# Altium PCB 175-00060, rev2, PCB, NRES RTD_TEC Board.PcbDoc (part 4 of 4)
Units mm, origin at the board's own origin, x right, y up, seen from the top; angles counter-clockwise.
Board outline 188.3 x 85 mm, 8 copper layers (Top Layer (*.GTL), MidLayer1 (*.G1), InternalPlane1 (*.GP1), InternalPlane2 (*.GP2), InternalPlane3 (*.GP3), InternalPlane4 (*.GP4), MidLayer2 (*.G2), Bottom Layer (*.GBL)), stack 1.748 mm thick; 256 components, 199 nets, 1067 pads, 575 vias.
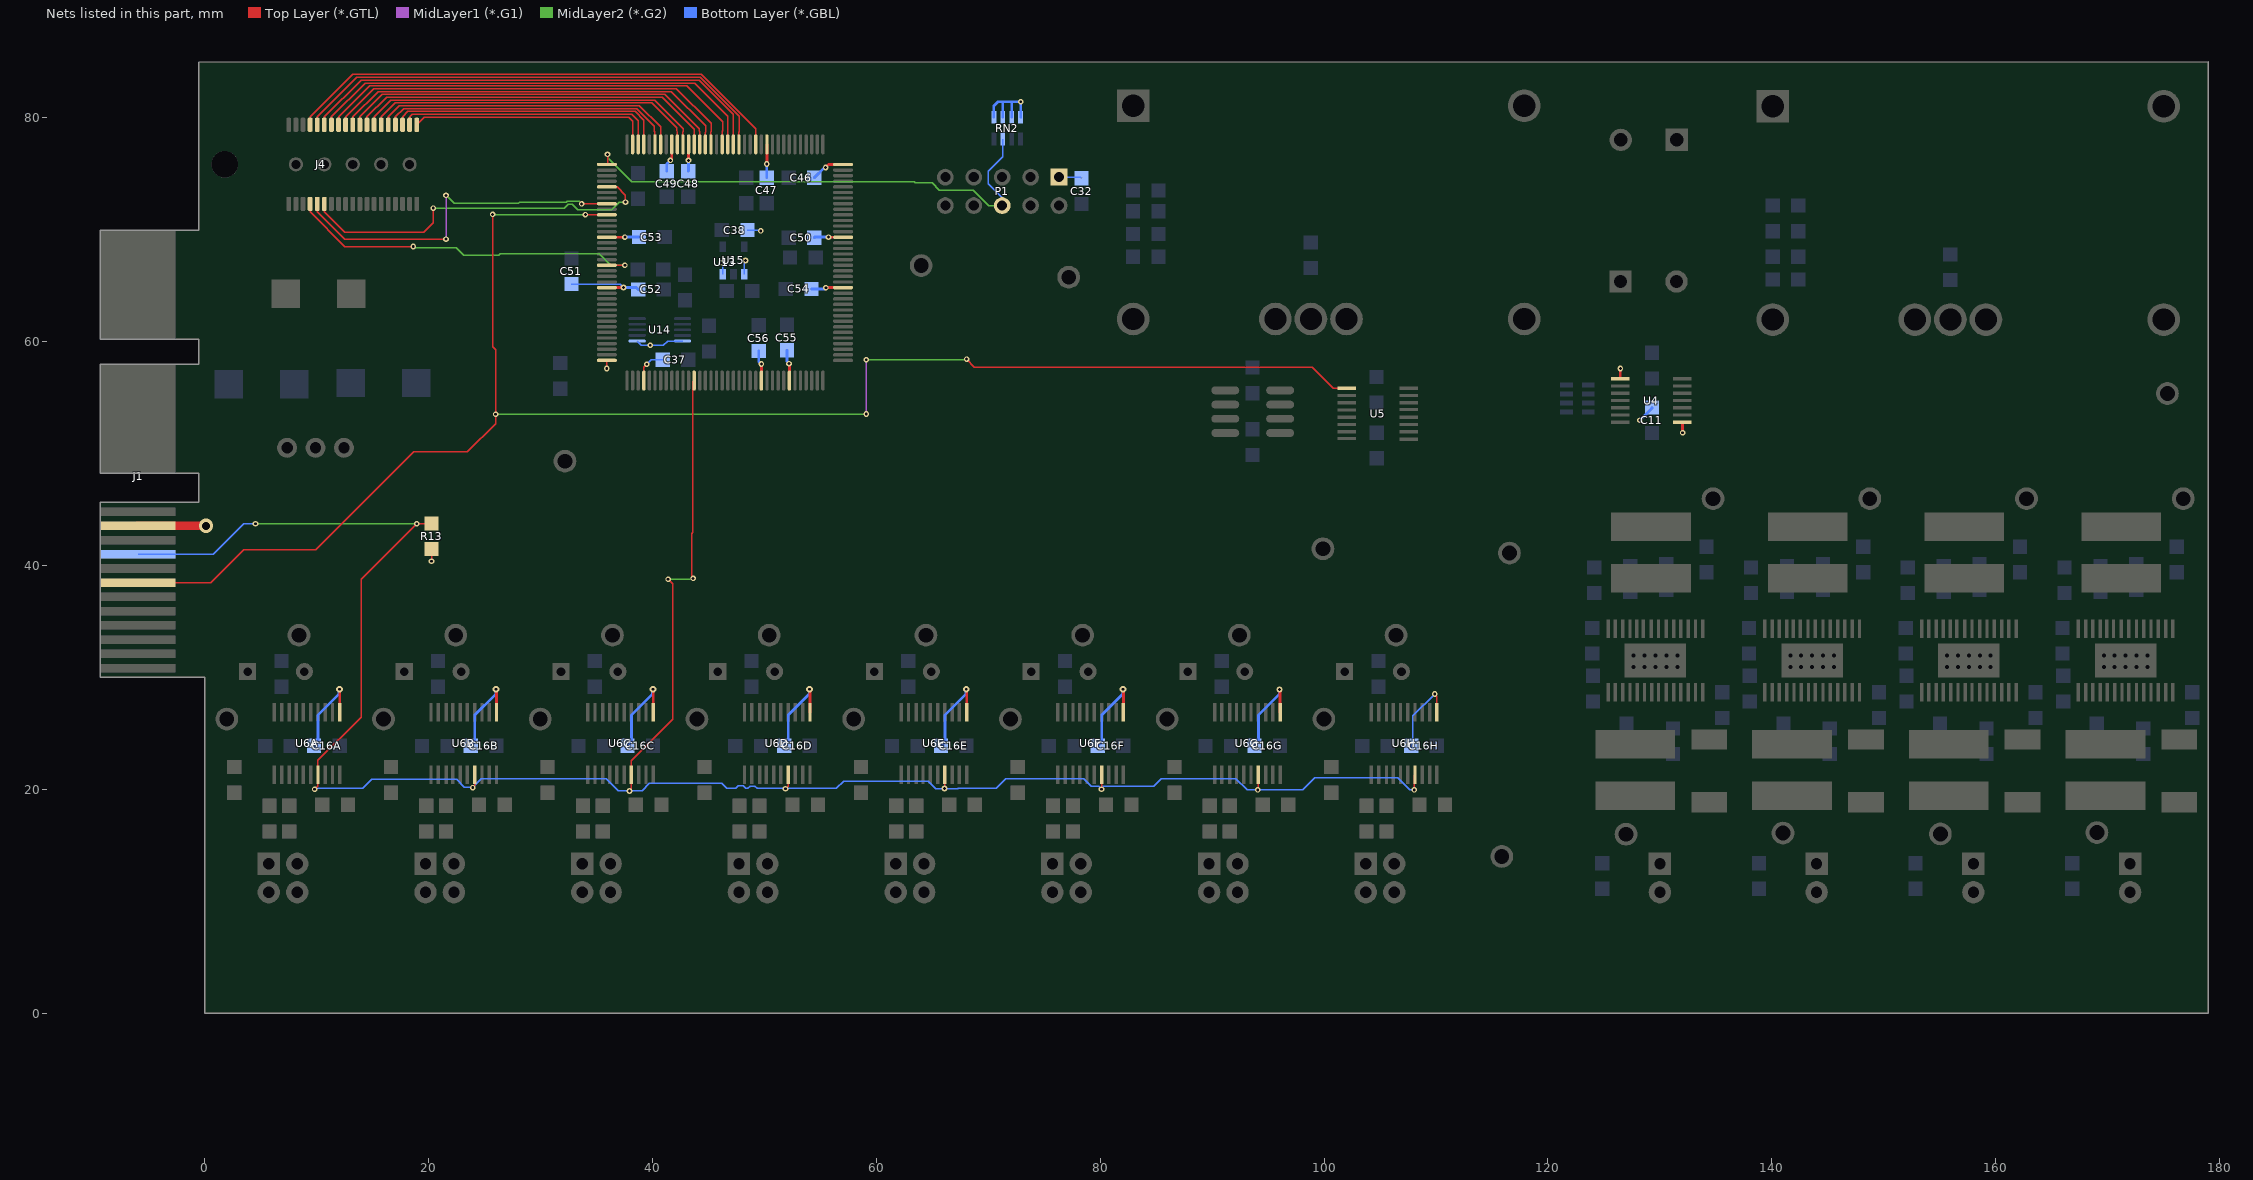
[diagram p10: the nets of this part, all layers, seen from the top]

## Via types
v1: diameter 0.508, hole 0.254, Top Layer (*.GTL) to Bottom Layer (*.GBL), tented both sides, 324 vias
v2: diameter 0.61, hole 0.254, Top Layer (*.GTL) to Bottom Layer (*.GBL), tented both sides, 234 vias
v3: diameter 1.27, hole 0.711, Top Layer (*.GTL) to Bottom Layer (*.GBL), 17 vias

## Nets (pads, with @x,y where several pads share a name; then routed paths per layer and width w, separated by ;. In a path a pad name is that pad's centre, name@x,y a point inside that pad or via, vN(x,y) a via of type N, cw(c..) or ccw(c..) an arc to the next point about the centre after c; other vN are vias at no path point) (continued)
TEST7: J4.7 U13.19 | length 32.5
  Top Layer (*.GTL) w0.127: J4.7@9.423,72.288 9.423,71.572 12.517,68.478 v1@18.618,68.478 ; U13.19@35.932,66.806 37.537,66.806 v1(37.541,66.802)
  MidLayer2 (*.G2) w0.127: v1(18.644,68.478) 18.745,68.377 22.479,68.377 23.139,67.716 26.264,67.716 26.391,67.843 35.255,67.843 36.297,66.802 v1(37.541,66.802)
TEST8: J4.8 U13.121 | length 45.5
  Top Layer (*.GTL) w0.127: J4.8@9.423,79.35 9.423,80.055 13.214,83.845 44.381,83.845 49.232,78.994 U13.121@49.232,77.606
TEST9: J4.9 U13.8 | length 32
  Top Layer (*.GTL) w0.127: J4.9@10.058,72.288 10.058,71.572 12.517,69.113 18.618,69.113 18.644,69.139 v1(21.565,69.139) ; v1(33.68,72.288) 33.698,72.306 U13.8@35.932,72.306
  MidLayer1 (*.G1) w0.127: v1(21.565,69.139) v1(21.565,73.05)
  MidLayer2 (*.G2) w0.127: v1(21.565,73.05) 22.288,72.326 28.023,72.326 28.137,72.441 32.312,72.441 32.375,72.504 33.465,72.504 v1(33.68,72.288)
TEST10: J4.10 U13.124 | length 43.8
  Top Layer (*.GTL) w0.127: J4.10@10.058,79.35 10.058,80.055 13.595,83.591 44.276,83.591 47.752,80.115 47.752,78.715 47.732,78.695 U13.124@47.732,77.606
TEST11: J4.11 U13.5 | length 33.2
  Top Layer (*.GTL) w0.127: J4.11@10.693,72.288 10.693,71.572 12.517,69.748 19.583,69.748 20.422,70.587 v1(20.422,71.907) ; U13.5@35.932,73.806 36.862,73.806 37.592,73.076 v1(37.592,72.441)
  MidLayer2 (*.G2) w0.127: v1(20.422,71.907) 32.137,71.907 32.48,72.25 32.849,72.25 33.318,71.78 36.373,71.78 37.033,72.441 v1(37.592,72.441)
TEST12: J4.12 U13.125 | length 42.5
  Top Layer (*.GTL) w0.127: J4.12@10.693,79.35 10.693,80.055 13.976,83.337 44.171,83.337 47.232,80.276 U13.125@47.232,77.606
TEST14: J4.14 U13.126 | length 41.1
  Top Layer (*.GTL) w0.127: J4.14@11.328,79.35 11.328,80.055 14.357,83.083 43.764,83.083 46.736,80.112 46.736,78.791 46.732,78.787 U13.126@46.732,77.606
TEST16: J4.16 U13.127 | length 39.5
  Top Layer (*.GTL) w0.127: J4.16@11.963,79.35 11.963,80.055 14.738,82.829 43.078,82.829 46.279,79.629 46.279,78.816 46.232,78.769 U13.127@46.232,77.606
TEST18: J4.18 U13.129 | length 37.5
  Top Layer (*.GTL) w0.127: J4.18@12.598,79.35 12.598,80.055 15.119,82.575 42.139,82.575 45.237,79.477 45.237,78.74 45.232,78.735 U13.129@45.232,77.606
TEST20: J4.20 U13.130 | length 36.1
  Top Layer (*.GTL) w0.127: J4.20@13.233,79.35 13.233,80.055 15.5,82.321 41.681,82.321 44.755,79.248 44.755,78.697 44.732,78.674 U13.130@44.732,77.606
TEST22: J4.22 U13.131 | length 34.5
  Top Layer (*.GTL) w0.127: J4.22@13.868,79.35 13.868,80.055 15.881,82.067 41.123,82.067 44.196,78.994 44.196,78.791 44.232,78.755 U13.131@44.232,77.606
TEST24: J4.24 U13.132 | length 33.2
  Top Layer (*.GTL) w0.127: J4.24@14.503,79.35 14.503,80.055 16.262,81.813 40.869,81.813 43.739,78.943 43.739,78.854 43.732,78.848 U13.132@43.732,77.606
TEST26: J4.26 U13.134 | length 31.4
  Top Layer (*.GTL) w0.127: J4.26@15.138,79.35 15.138,80.055 16.643,81.559 40.208,81.559 42.748,79.019 42.748,78.74 42.732,78.724 U13.134@42.732,77.606
TEST28: J4.28 U13.135 | length 30
  Top Layer (*.GTL) w0.127: J4.28@15.773,79.35 15.773,80.055 17.024,81.305 39.954,81.305 42.164,79.096 42.164,78.816 42.232,78.748 U13.135@42.232,77.606
TEST30: J4.30 U13.138 | length 27.8
  Top Layer (*.GTL) w0.127: J4.30@16.408,79.35 16.408,80.055 17.405,81.051 38.837,81.051 40.732,79.156 U13.138@40.732,77.606
TEST32: J4.32 U13.139 | length 26.4
  Top Layer (*.GTL) w0.127: J4.32@17.043,79.35 17.043,80.055 17.786,80.797 38.608,80.797 40.183,79.223 40.183,78.765 40.232,78.716 U13.139@40.232,77.606
TEST34: J4.34 U13.141 | length 24.9
  Top Layer (*.GTL) w0.127: J4.34@17.678,79.35 17.678,80.055 18.167,80.543 38.456,80.543 39.232,79.767 U13.141@39.232,77.606
TEST36: J4.36 U13.142 | length 23.6
  Top Layer (*.GTL) w0.127: J4.36@18.313,79.35 18.313,80.055 18.548,80.289 38.176,80.289 38.732,79.734 U13.142@38.732,77.606
TEST38: J4.38 U13.143 | length 21.8
  Top Layer (*.GTL) w0.127: J4.38@18.948,79.35 19.634,80.035 37.871,80.035 38.232,79.675 U13.143@38.232,77.606
TMS: P1.6 RN2.5 U13.1 | length 45.2
  Top Layer (*.GTL) w0.127: U13.1@35.932,75.806 35.992,75.866 v1(35.992,76.708)
  MidLayer2 (*.G2) w0.127: v1(35.992,76.708) 35.992,76.403 38.151,74.244 63.398,74.244 63.475,74.168 64.999,74.168 65.646,73.52 68.653,73.52 70.037,72.136 P1.6@71.247,72.136
  Bottom Layer (*.GBL) w0.127: P1.6@71.247,72.136 71.247,72.847 70.002,74.092 70.002,75.209 71.298,76.505 RN2.5@71.298,78.078
VCC: C11.1 C16A.2 C16B.2 C16C.2 C16D.2 C16E.2 C16F.2 C16G.2 C16H.2 C32.2 C37.2 C38.2 C46.2 C47.2 C48.2 C49.2 C50.2 C51.2 C52.2 C53.2 C54.2 C55.2 C56.2 J1.S23 P1.1 R13.2 RN2.2 RN2.4 RN2.6 RN2.8 U4.1 U4.8 U6A.1 U6B.1 U6C.1 U6D.1 U6E.1 U6F.1 U6G.1 U6H.1 U13.14 U13.23 U13.36 U13.40 U13.61 U13.66 U13.86 U13.95 U13.108 U13.119 U13.133 U13.136 U14.5 U14.6 U15.1 U15.3 | length 128.7
  Top Layer (*.GTL) w0.127: v1(20.269,40.361) R13.2@20.269,41.453 ; v1(35.916,57.582) 35.932,57.598 U13.36@35.932,58.306 ; U13.40@39.232,56.506 39.232,57.698 v1(39.497,57.963) ; v1(109.88,28.499) 110.074,28.305 U6H.1@110.074,26.861
  Top Layer (*.GTL) w0.254: v2(12.04,28.931) 12.074,28.896 U6A.1@12.074,26.861 ; v2(26.04,28.931) 26.074,28.896 U6B.1@26.074,26.861 ; U13.23@35.932,64.806 37.399,64.806 v1(37.414,64.821) ; U13.14@35.932,69.306 37.531,69.306 v1(37.541,69.317) ; v2(40.04,28.931) 40.074,28.896 U6C.1@40.074,26.861 ; v1(41.605,76.175) 41.732,76.301 U13.136@41.732,77.606 ; v1(43.231,76.175) 43.232,76.176 U13.133@43.232,77.606 ; U13.61@49.732,56.506 v1(49.732,57.989) ; v1(50.216,75.844) 50.232,75.861 U13.119@50.232,77.606 ; v1(52.197,58.014) 52.232,57.979 U13.66@52.232,56.506 ; v2(54.04,28.931) 54.074,28.896 U6D.1@54.074,26.861 ; v1(55.474,75.54) 55.74,75.806 U13.108@57.032,75.806 ; v1(55.499,64.795) 55.51,64.806 U13.86@57.032,64.806 ; v1(55.728,69.317) 55.738,69.306 U13.95@57.032,69.306 ; v2(68.04,28.931) 68.074,28.896 U6E.1@68.074,26.861 ; v2(82.04,28.931) 82.074,28.896 U6F.1@82.074,26.861 ; U6G.1@96.074,26.861 v1@96.074,28.896 ; U4.1@126.454,56.672 126.454,57.569 v1(126.467,57.582) ; U4.8@132.004,52.772 132.004,51.867 v1(132.029,51.841)
  Top Layer (*.GTL) w0.762: J1.S23@-5.95,43.525 v3(0.117,43.525)
  Bottom Layer (*.GBL) w0.127: C51.2@32.766,65.126 37.109,65.126 v1(37.414,64.821) ; U14.6@38.64,60.036 39.012,59.665 v1(39.802,59.665) 39.827,59.639 40.97,59.639 41.364,60.033 42.687,60.033 U14.5@42.69,60.036 ; v1(39.497,57.963) 39.903,58.369 C37.2@40.919,58.369 ; v1(46.126,67.031) 46.294,66.863 U15.3@46.294,66.009 ; U15.1@48.194,66.009 48.194,67.117 v1(48.311,67.234) ; C38.2@48.489,69.952 49.606,69.952 v1(49.682,69.875) ; P1.1@76.327,74.676 78.232,74.676 C32.2@78.334,74.574 ; C16H.2@107.779,23.876 107.937,24.034 107.937,26.556 v1(109.88,28.499)
  Bottom Layer (*.GBL) w0.254: C16A.2@9.754,23.851 C16A.2@9.779,23.876 10.135,24.232 10.135,26.619 12.014,28.499 12.014,28.905 v2(12.04,28.931) ; C16B.2@23.754,23.851 C16B.2@23.779,23.876 24.135,24.232 24.135,26.619 26.014,28.499 26.014,28.905 v2(26.04,28.931) ; v1(37.414,64.821) 38.557,64.821 C52.2@38.735,64.643 ; v1(37.541,69.317) C53.2@38.811,69.317 ; C16C.2@37.754,23.851 C16C.2@37.779,23.876 38.135,24.232 38.135,26.619 40.014,28.499 40.014,28.905 v2(40.04,28.931) ; C49.2@41.275,75.209 41.275,75.844 v1(41.605,76.175) ; C48.2@43.205,75.209 43.231,75.235 v1(43.231,76.175) ; C56.2@49.505,59.157 49.505,58.217 v1(49.732,57.989) ; C47.2@50.216,74.625 v1(50.216,75.844) ; C16D.2@51.754,23.851 C16D.2@51.779,23.876 52.135,24.232 52.135,26.619 54.014,28.499 54.014,28.905 v2(54.04,28.931) ; C55.2@52.019,59.207 52.019,58.191 v1(52.197,58.014) ; C54.2@54.204,64.694 55.397,64.694 v1(55.499,64.795) ; C50.2@54.458,69.266 54.508,69.317 v1(55.728,69.317) ; C46.2@54.458,74.625 55.372,75.54 v1(55.474,75.54) ; C16E.2@65.754,23.851 C16E.2@65.779,23.876 66.135,24.232 66.135,26.619 68.014,28.499 68.014,28.905 v2(68.04,28.931) ; RN2.8@70.498,80.028 70.498,81.039 70.866,81.407 72.136,81.407 ; RN2.6@71.298,80.028 71.298,81.356 ; RN2.4@72.098,80.028 72.098,81.369 72.136,81.407 ; RN2.2@72.898,80.028 v1(72.898,81.407) 72.136,81.407 ; C16F.2@79.754,23.851 C16F.2@79.779,23.876 80.135,24.232 80.135,26.619 82.014,28.499 82.014,28.905 v2(82.04,28.931) ; C16G.2@93.779,23.876 94.135,24.232 94.135,26.619 96.014,28.499 v1(96.014,28.905) ; C16H.2@107.754,23.851 C16H.2@107.779,23.876 ; v1(128.219,52.959) 129.286,54.026 C11.1@129.286,54.102
~DRDY: J1.S9 R13.1 U6A.17 U6B.17 U6C.17 U6D.17 U6E.17 U6F.17 U6G.17 U6H.17 U13.49 | length 206.9
  Top Layer (*.GTL) w0.127: v1(9.83,19.99) 10.124,20.284 U6A.17@10.124,21.311 10.124,22.581 13.97,26.426 13.97,38.735 v1(18.948,43.713) 20.244,43.713 R13.1@20.269,43.739 ; v1(23.952,20.142) 24.124,20.314 U6B.17@24.124,21.311 ; v1(37.948,19.837) 38.124,20.014 U6C.17@38.124,21.311 38.124,22.555 41.808,26.239 41.808,38.354 v1(41.402,38.76) ; v1(43.637,38.837) 43.497,38.976 43.497,42.818 43.624,42.945 43.624,56.399 U13.49@43.732,56.506 ; v1(51.892,20.041) 52.124,20.273 U6D.17@52.124,21.311 ; v1(66.091,20.066) 66.124,20.099 U6E.17@66.124,21.311 ; v1(80.124,20.003) U6F.17@80.124,21.311 ; v1(94.082,19.939) 94.124,19.982 U6G.17@94.124,21.311 ; v1(108.052,19.939) U6H.17@108.052,21.238
  MidLayer2 (*.G2) w0.127: v1(4.547,43.713) v1(18.948,43.713) ; v1(41.402,38.76) 43.561,38.76 v1(43.637,38.837)
  Bottom Layer (*.GBL) w0.127: J1.S9@-5.95,40.985 0.777,40.985 3.505,43.713 v1(4.547,43.713) ; v1(9.83,19.99) 9.919,20.079 14.135,20.079 14.935,20.879 22.504,20.879 23.19,20.193 23.952,20.193 24.689,20.93 35.865,20.93 36.932,19.863 39.085,19.863 39.733,20.51 46.215,20.51 46.66,20.066 47.446,20.066 47.688,20.307 48.098,20.307 48.339,20.066 48.513,20.066 48.729,20.282 49.139,20.282 49.355,20.066 53.288,20.066 53.301,20.079 53.711,20.079 53.724,20.066 56.413,20.066 57.074,20.726 64.643,20.726 65.329,20.041 67.263,20.041 67.301,20.079 70.701,20.079 71.552,20.93 78.537,20.93 79.197,20.269 79.858,20.269 v1(80.124,20.003) ; 80.124,20.269 84.785,20.269 85.471,20.955 92.1,20.955 93.116,19.939 v1(94.082,19.939) 98.095,19.939 99.187,21.031 106.578,21.031 107.671,19.939 v1(108.052,19.939)
~LDAC: J1.S19 U5.1 U13.10 | length 148.9
  Top Layer (*.GTL) w0.127: J1.S19@-5.95,38.445 0.549,38.445 3.48,41.377 9.913,41.377 18.676,50.14 23.477,50.14 25.997,52.66 v1(25.997,53.492) 25.997,59.258 25.73,59.525 v1(25.73,71.349) ; v1(34.011,71.323) 33.985,71.323 34.002,71.306 U13.10@35.932,71.306 ; v1@68.059,58.407 68.758,57.709 98.927,57.709 100.813,55.823 U5.1@102.006,55.823
  MidLayer1 (*.G1) w0.127: v1(59.106,53.518) v1(59.106,58.369)
  MidLayer2 (*.G2) w0.127: v1(25.73,71.349) 25.756,71.323 v1(34.011,71.323) ; v1(25.997,53.492) 59.08,53.492 v1(59.106,53.518) ; v1(59.106,58.369) 68.021,58.369 v1(68.072,58.42)
pads on no net: J4.13 J4.15 J4.17 J4.19 J4.21 J4.23 J4.25 J4.27 J4.29 J4.31 J4.33 J4.35 J4.37 J4.A P1.3 P1.5 P1.7 P1.9 U2.3 U2.5 U3.3 U3.5 U4.6 U4.9 U5.6 U5.7 U5.10 U5.11 U6A.10 U6B.10 U6C.10 U6D.10 U6E.10 U6F.10 U6G.10 U6H.10 U7A.13 U7B.13 U7C.13 U7D.13 U8.1 U8.5 U8.7 U8.8 U13.33 U13.35 U13.39 U13.53 U13.55 U13.63 U13.73 U13.74 U13.80 U13.85 U13.87 U13.88 U13.90 U13.91 U13.92 U13.93 U13.96 U13.97 U13.98 U13.99 U13.101 U13.102 U13.103 U13.104 U13.105 U13.110 U13.111 U13.112 U13.113 U13.114 U13.115 U13.123 U13.140 U15.4
copper on no net: | length 7.5
  Top Layer (*.GTL) w0.254: v2(9.119,18.923) 9.347,19.152
  Bottom Layer (*.GBL) w0.254: 73.203,3.302 ccw(c72.068,3.302) 73.203,3.302
  other v2: 37.119,18.923

## Polygon pours and split planes (outlines as drawn)
A on InternalPlane1 (*.GP1) (split plane): 0,57.728 118.728,57.728 118.728,0.51 0.51,0.51 0.51,30 0.501,30.1 0.472,30.195 0.424,30.284 0.361,30.361 0.284,30.424 0.195,30.472 0.1,30.501 0,30.51 -8.793,30.51 -8.793,45.111 -0.54,45.111 -0.44,45.12 -0.345,45.149 -0.256,45.197 -0.179,45.26 -0.116,45.337 -0.068,45.426 -0.039,45.521 -0.03,45.621 -0.03,48.212 -0.039,48.311 -0.068,48.407 -0.116,48.495 -0.179,48.573 -0.256,48.636 -0.345,48.683 -0.44,48.712 -0.54,48.722 -8.793,48.722 -8.793,57.43 -0.54,57.43 -0.44,57.439 -0.345,57.468 -0.256,57.516 -0.179,57.579 -0.116,57.656 -0.075,57.732
T on InternalPlane1 (*.GP1) (split plane): 178.49,0.51 121.272,0.51 121.272,59 121.264,59.142 121.24,59.283 121.201,59.42 121.146,59.552 121.077,59.677 120.994,59.793 120.899,59.899 120.793,59.994 120.677,60.077 120.552,60.146 120.42,60.201 120.283,60.24 120.142,60.264 120,60.272 0,60.272 -0.036,60.27 -0.039,60.3 -0.068,60.396 -0.116,60.484 -0.179,60.562 -0.256,60.625 -0.345,60.672 -0.44,60.701 -0.54,60.711 -8.793,60.711 -8.793,69.418 -0.54,69.418 -0.44,69.428 -0.345,69.457 -0.256,69.504 -0.179,69.568 -0.116,69.645 -0.068,69.733 -0.039,69.829 -0.03,69.929 -0.03,84.419 178.49,84.489
+5VTEC1 on InternalPlane2 (*.GP2) (split plane): 135.744,52.002 135.744,51.998 135.744,51.994 135.748,51.965 135.752,51.935 135.754,51.932 135.754,51.928 135.766,51.901 135.777,51.873 135.78,51.87 135.781,51.867 135.8,51.844 135.818,51.82 135.821,51.818 135.823,51.815 135.847,51.797 135.87,51.779 135.874,51.778 135.877,51.775 135.905,51.765 135.932,51.753 135.936,51.752 135.939,51.751 135.969,51.748 135.998,51.744 136.002,51.744 136.006,51.744 150.744,52.078 150.744,0.51 121.272,0.51 121.272,59 121.264,59.142 121.24,59.283 121.201,59.42 121.146,59.552 121.077,59.677 120.994,59.793 120.899,59.899 120.793,59.994 120.677,60.077 120.552,60.146 120.42,60.201 120.283,60.24 120.142,60.264 120,60.272 114.006,60.272 114.006,67.384 135.849,67.384
+5VTEC2 on InternalPlane2 (*.GP2) (split plane): 178.49,0.51 151.256,0.51 151.256,52 151.256,75 151.247,75.066 151.222,75.128 151.181,75.181 151.128,75.222 151.066,75.247 151,75.256 129.256,75.256 129.256,81 129.256,84.47 178.49,84.489
+24V on InternalPlane2 (*.GP2) (split plane): 128.744,81 128.744,75 128.753,74.934 128.778,74.872 128.819,74.819 128.872,74.778 128.934,74.753 129,74.744 150.744,74.744 150.744,52.59 136.258,52.262 136.363,67.638 136.363,67.639 136.363,67.64 136.359,67.672 136.355,67.705 136.354,67.706 136.354,67.707 136.342,67.736 136.329,67.767 136.329,67.768 136.309,67.794 136.289,67.82 136.288,67.821 136.262,67.841 136.236,67.861 136.235,67.862 136.205,67.875 136.175,67.887 136.174,67.887 136.173,67.888 136.14,67.892 136.108,67.896 136.107,67.896 113.75,67.896 113.684,67.888 113.622,67.862 113.569,67.821 113.528,67.768 113.503,67.707 113.494,67.64 113.494,60.272 -0.037,60.272 -0.039,60.3 -0.068,60.396 -0.116,60.484 -0.179,60.562 -0.256,60.625 -0.345,60.672 -0.44,60.701 -0.54,60.711 -8.793,60.711 -8.793,69.418 -0.54,69.418 -0.44,69.428 -0.345,69.457 -0.256,69.504 -0.179,69.568 -0.116,69.645 -0.068,69.733 -0.039,69.829 -0.03,69.929 -0.03,84.419 128.744,84.47
+5ANA on InternalPlane2 (*.GP2) (split plane): 114,57.728 118.728,57.728 118.728,0.51 0.51,0.51 0.51,30 0.501,30.1 0.472,30.195 0.424,30.284 0.361,30.361 0.284,30.424 0.195,30.472 0.1,30.501 0,30.51 -8.793,30.51 -8.793,45.111 -0.54,45.111 -0.44,45.12 -0.345,45.149 -0.256,45.197 -0.179,45.26 -0.116,45.337 -0.068,45.426 -0.039,45.521 -0.03,45.621 -0.03,48.212 -0.039,48.311 -0.068,48.407 -0.116,48.495 -0.179,48.573 -0.256,48.636 -0.345,48.683 -0.44,48.712 -0.54,48.722 -8.793,48.722 -8.793,57.43 -0.54,57.43 -0.44,57.439 -0.345,57.468 -0.256,57.516 -0.179,57.579 -0.116,57.656 -0.077,57.728 113.75,57.728 113.875,57.735
D on InternalPlane3 (*.GP3) (split plane): 178.49,0.51 0.51,0.51 0.51,30 0.501,30.1 0.472,30.195 0.424,30.284 0.361,30.361 0.284,30.424 0.195,30.472 0.1,30.501 0,30.51 -8.793,30.51 -8.793,45.111 -0.54,45.111 -0.44,45.12 -0.345,45.149 -0.256,45.197 -0.179,45.26 -0.116,45.337 -0.068,45.426 -0.039,45.521 -0.03,45.621 -0.03,48.212 -0.039,48.311 -0.068,48.407 -0.116,48.495 -0.179,48.573 -0.256,48.636 -0.345,48.683 -0.44,48.712 -0.54,48.722 -8.793,48.722 -8.793,57.43 -0.54,57.43 -0.44,57.439 -0.345,57.468 -0.256,57.516 -0.179,57.579 -0.116,57.656 -0.068,57.745 -0.039,57.84 -0.03,57.94 -0.03,60.201 -0.039,60.3 -0.068,60.396 -0.116,60.484 -0.179,60.562 -0.256,60.625 -0.345,60.672 -0.44,60.701 -0.54,60.711 -8.793,60.711 -8.793,69.418 -0.54,69.418 -0.44,69.428 -0.345,69.457 -0.256,69.504 -0.179,69.568 -0.116,69.645 -0.068,69.733 -0.039,69.829 -0.03,69.929 -0.03,84.419 178.49,84.489
VCC on InternalPlane4 (*.GP4) (split plane): 178.49,0.51 0.51,0.51 0.51,30 0.501,30.1 0.472,30.195 0.424,30.284 0.361,30.361 0.284,30.424 0.195,30.472 0.1,30.501 0,30.51 -8.793,30.51 -8.793,45.111 -0.54,45.111 -0.44,45.12 -0.345,45.149 -0.256,45.197 -0.179,45.26 -0.116,45.337 -0.068,45.426 -0.039,45.521 -0.03,45.621 -0.03,48.212 -0.039,48.311 -0.068,48.407 -0.116,48.495 -0.179,48.573 -0.256,48.636 -0.345,48.683 -0.44,48.712 -0.54,48.722 -8.793,48.722 -8.793,57.43 -0.54,57.43 -0.44,57.439 -0.345,57.468 -0.256,57.516 -0.179,57.579 -0.116,57.656 -0.068,57.745 -0.039,57.84 -0.03,57.94 -0.03,60.201 -0.039,60.3 -0.068,60.396 -0.116,60.484 -0.179,60.562 -0.256,60.625 -0.345,60.672 -0.44,60.701 -0.54,60.711 -8.793,60.711 -8.793,69.418 -0.54,69.418 -0.44,69.428 -0.345,69.457 -0.256,69.504 -0.179,69.568 -0.116,69.645 -0.068,69.733 -0.039,69.829 -0.03,69.929 -0.03,84.419 178.49,84.489

## Other copper
Top Layer (*.GTL):
  text "*.GTL - TOP LAYER GERBER DATA" at 60.865,-39.579 h2.03
MidLayer1 (*.G1):
  text "*.G1 - MID LAYER 1 GERBER DATA" at 60.865,-39.579 h2.03
MidLayer2 (*.G2):
  text "*.G2 - MID LAYER 2 GERBER DATA" at 60.865,-39.579 h2.03
Bottom Layer (*.GBL):
  text "175-00060 rev2" at 72.974,6.833 h1.02
  text "PCB, NRES, RTD/TEC BOARD" at 72.873,5.029 h1.02
  text "c" at 72.466,2.921 h1.02
  text "2104, LAS CUMBRES OBSERVATORY" at 69.952,2.819 h1.02
  text "*.GBL - BOTTOM LAYER GERBER DATA" at 60.865,-39.579 h2.03
InternalPlane1 (*.GP1) (plane layer: these items are gaps in the copper):
  lines w2.54: 0,59 120,59 120,0.34
  text "*.GP1 - INTERNAL PLANE LAYER 1 GERBER DATA" at 60.865,-39.579 h2.03
InternalPlane2 (*.GP2) (plane layer: these items are gaps in the copper):
  lines w0.508: 113.75,59.25 113.75,67.64 136.107,67.64 136,52 151,52.34 151,0.34 ; 120,0.34 120,52.34 120.66,52.34 ; 129,85 129,81 129,75 151,75 151,52
  lines w2.54: -0.54,59 113.75,59 ; 114,59 120,59 120,0
  text "*.GP2 - INTERNAL PLANE LAYER 2 GERBER DATA" at 60.865,-39.579 h2.03
InternalPlane3 (*.GP3) (plane layer: these items are gaps in the copper):
  text "*.GP3- INTERNAL PLANE LAYER 3 GERBER DATA" at 60.865,-39.579 h2.03
InternalPlane4 (*.GP4) (plane layer: these items are gaps in the copper):
  text "*.GP4 - INTERNAL PLANE LAYER 4 GERBER DATA" at 60.865,-39.579 h2.03

## Silkscreen, mask and mechanical layers (free items; w line width, h text height)
Top Overlay:
  rectangle: 154.153,54.966 159.791,58.217
  lines w0.254: 4.906,47.995 14.906,47.995 ; 8.509,16.18 9.398,15.138 ; 126.492,74.955 126.492,76.733 ; 131.496,75.032 131.496,76.733 ; 124,60 124,74.905 134,74.905 134,60 124,60
  text "VCC" at 77.775,73.228 h0.76
  text "TDI" at 67.818,70.231 h0.76
  text "TDO" at 73.152,70.104 h0.76
  text "GND" at 65.405,69.85 h0.64
  text "TCK" at 75.819,69.85 h0.76
  text "TMS" at 70.485,69.723 h0.76
  text "+24V" at 61.747,64.059 h1.02
  text "+5VTEC1" at 73.508,63.068 h1.02
  text "780-00055 rev:" at 140.208,56.236 h1.02
  text "+5VTEC2" at 166.522,55.753 h1.02
  text "SCH, NRES, RTD/TEC BOARD" at 140.106,53.569 h1.02
  text "+12V" at 30.556,46.533 h1.02
  text "S24" at -1.549,44.298 h0.76
  text "+5ANA" at 101.143,39.446 h1.02
  text "AGND" at 115.291,38.303 h1.02
  text "S13" at -2.134,30.505 h0.76
  text "AGND" at 114.122,11.074 h1.02
  text "*.GTO - TOP OVERLAY GERBER DATA" at 60.865,-39.579 h2.03
  text "PCB is 3mm back from backside of front panel" at 167.248,-68.922 h1.02
  text "the 3mm leaves room for back nut and washer" at 167.248,-72.322 h1.02
  text "LEMOs are installed flush to PCB then back nut is screwed on" at 166.248,-75.822 h1.02
  text "LEMO sticks out of front panel 4mm to fit nut + colored washer" at 165.248,-78.822 h1.02
Bottom Overlay:
  lines w0.254: 126.5,66.954 126.5,68.75 ; 131.5,66.75 131.5,68.75 ; 124,68.758 124,84 134,84 134,68.758 124,68.758
  text "S12" at -0.076,44.323 h0.76
  text "*GBO - BOTTOM OVERLAY GERBER DATA" at 60.865,-39.579 h2.03
Top Paste:
  text "*.GTP - TOP-SIDE SOLDER PASTE MASK" at 60.865,-39.579 h2.03
Bottom Paste:
  text "*.GBP - BOTTOM-SIDE SOLDER PASTE MASK" at 60.865,-39.579 h2.03
Top Solder:
  text "*.GTS - TOP SOLDER MASK GERBER DATA" at 60.865,-39.579 h2.03
Bottom Solder:
  rectangle: 40.03,0.584 74.168,8.509
  text "*.GBS - BOTTOM SOLDER MASK GERBER DATA" at 60.865,-39.579 h2.03
Mechanical 1:
  lines w0.5: -0.54,30 0,30 0,0 179,0 179,85 -0.469,85 -0.54,84.929 -0.54,69.929
Mechanical 2:
  drawing of 683 lines, arcs and shapes, not listed
  text "NOTES (UNLESS OTHERWISE SPECIFIED):" at -262.274,145.663 h2.29
  text "GENERAL" at -259.734,140.583 h2.29
  text "1)" at -257.194,135.502 h1.91
  text "PCB IS 8-LAYER, .062\" THICK." at -252.114,135.503 h1.91
  text "2)" at -257.194,131.692 h1.91
  text "CONSTRUCTION IS SOLDER-MASK-OVER-BARE-COPPER (SMOBC)." at -252.114,131.692 h1.91
  text "3)" at -257.194,127.882 h1.91
  text "ACCEPTABILITY SHALL BE BASED ON IPC-A-600, CLASS 2." at -252.114,127.882 h1.91
  text "4)" at -257.194,124.072 h1.91
  text "THE FOLLOWING GERBER RS274X PHOTO TOOL FILES SHALL BE USED TO DEFINE ALL CIRCUIT FEATURES:" at -252.114,124.072 h1.91
  text "*.GTL - TOP LAYER GERBER DATA" at -245.154,118.714 h2.03
  text "*.G1 - MID LAYER 1 GERBER DATA" at -245.154,114.811 h2.03
  text "*.G2 - MID LAYER 2 GERBER DATA" at -245.154,110.544 h2.03
  text "*.GP1 - INTERNAL PLANE LAYER 1 GERBER DATA" at -245.154,103.102 h2.03
  text "*.GP2 - INTERNAL PLANE LAYER 2 GERBER DATA" at -245.154,99.198 h2.03
  text "*.GP3- INTERNAL PLANE LAYER 3 GERBER DATA" at -245.154,95.295 h2.03
  text "*.GP4 - INTERNAL PLANE LAYER 4 GERBER DATA" at -245.154,91.392 h2.03
  text "*.GBL - BOTTOM LAYER GERBER DATA" at -245.154,83.586 h2.03
  text "*.GTO - TOP OVERLAY GERBER DATA" at -245.154,79.683 h2.03
  text "*.GTS - TOP SOLDER MASK GERBER DATA" at -245.154,75.78 h2.03
  text "PLATING AND CHAMFERING" at -79,72 h1.52
  text "*.GTP - TOP-SIDE SOLDER PASTE MASK" at -245.154,71.876 h2.03
  text "SEE .PDF FILE: SD-46114-400.PDF" at -79,68 h1.52
  text "*GBO - BOTTOM OVERLAY GERBER DATA" at -245.154,67.973 h2.03
  text "INCLUDED IN DRAWING PACKAGE" at -79,65 h1.52
  text "*.GBS - BOTTOM SOLDER MASK GERBER DATA" at -245.154,64.07 h2.03
  text "*.GBP - BOTTOM-SIDE SOLDER PASTE MASK" at -245.154,60.167 h2.03
  text "5)" at -259.657,41.987 h1.91
  text "THE PHOTO TOOL SHALL NOT BE COMPENSATED WITHOUT PRIOR ENGINEERING APPROVAL." at -254.577,41.987 h1.91
  text "PCB DESIGNER: RICH LOBDILL   PH (805) 305-1393." at -254.577,38.178 h1.91
  text "FABRICATION TOLERANCES" at -258.26,29.89 h2.29
  text "6)" at -255.72,24.809 h1.91
  text "END PRODUCT CONDUCTOR WIDTHS AND PAD DIAMETERS SHALL NOT VARY MORE THAN" at -250.64,24.809 h1.91
  text "0.002\" FROM THE 1:1 DIMENSIONS OF THE MASTER ARTWORK." at -250.64,21 h1.91
  text "7)" at -255.72,17.189 h1.91
  text "THE CONDUCTIVE PATTERN SHALL BE POSITIONED SO THAT THE LOCATION OF ANY PAD OR" at -250.64,17.189 h1.91
  text "LAND SHALL BE WITHIN 0.005\" DIAMETER TO THE TRUE POSITION OF THE HOLE IT CIRCUMSCRIBES." at -250.64,13.38 h1.91
  text "8)" at -255.72,9.569 h1.91
  text "ALL DRILL HOLE SIZES AND TOLERANCES APPLY AFTER PLATING." at -250.64,9.569 h1.91
  text "9)" at -255.72,5.759 h1.91
  text "THE MINIMUM ANNULAR RING SHALL BE 0.005\"." at -250.64,5.759 h1.91
  text "10)" at -257.117,1.949 h1.91
  text "BOW AND TWIST SHALL NOT EXCEED 0.010\" PER INCH." at -250.64,1.949 h1.91
  text "11)" at -256.863,-1.861 h1.91
  text "FOR PCB ROUTING DIMENSIONS: .XXX = +/-.005\"  .XX = +/-.020\"" at -250.64,-1.861 h1.91
  text "MATERIAL" at -258.26,-6.94 h2.29
  text "12)" at -257.117,-12.021 h1.91
  text "BASE MATERIAL IS FR4 EPOXY FIBERGLASS" at -250.463,-12.172 h1.91
  text "SEE STACK-UP LEGEND FOR COPPER CLADDING CALL OUTS" at -250.463,-15.728 h1.91
  text "13)" at -257.117,-15.831 h1.91
  text "PLATING" at -258.26,-20.91 h2.29
  text "14)" at -257.117,-25.864 h1.91
  text "ALL HOLES AND CONDUCTIVE SURFACES SHALL BE PLATED WITH A MINIMUM OF 0.001\" COPPER." at -250.64,-25.864 h1.91
  text "15)" at -257.117,-29.674 h1.91
  text "AFTER SOLDERMASK, ALL EXPOSED HOLES AND CONDUCTIVE SURFACES SHALL BE COATED" at -250.64,-29.674 h1.91
  text "WITH A GOLD IMMERSION PLATING TO PRESERVE SOLDERABILITY." at -250.463,-33.508 h1.91
  text "16)" at -256.457,-38.131 h1.91
  text "COPPER THEVING ON LAYERS AS NEEDED" at -250.386,-38.183 h1.91
  text "COATINGS" at -258.26,-46.056 h2.29
  text "THE SOLDERMASK SHALL BE BLACK LIQUID PHOTO-IMAGEABLE PER IPC-SM-840, TYPE-B, CLASS 2." at -250.64,-51.01 h1.91
  text "17)" at -256.838,-51.085 h1.91
  text "THE SOLDERMASK REGISTRATION ALLOWANCE IS 0.003\".  THERE SHALL BE NO SOLDERMASK ON" at -250.64,-54.82 h1.91
  text "18)" at -257.092,-55.53 h1.91
  text "ANY SOLDER PAD OR LAND." at -250.64,-58.63 h1.91
  text "MARKING" at -258.26,-63.709 h2.29
  text "THE LEGEND SHALL BE SCREEN-PRINTED USING PERMANENT YELLOW EPOXY INK." at -250.64,-68.663 h1.91
  text "19)" at -257.219,-68.738 h1.91
  text "THE SCREEN PRINTING REGISTRATION ALLOWANCE IS 0.007\".  THERE SHALL BE NO INK ON ANY" at -250.64,-72.473 h1.91
  text "20)" at -257.219,-72.929 h1.91
  text "SOLDER PAD OR LAND." at -250.64,-76.282 h1.91
  text "21)" at -257.117,-79.712 h1.91
  text "THE VENDOR CODE AND UL FLAMMABILITY RATING MAY BE ETCHED IN THE FOIL OR MARKED IN" at -250.64,-80.093 h1.91
  text "PERMANENT EPOXY INK (VENDOR'S OPTION)." at -250.64,-83.902 h1.91
  text "ELECTRICAL TESTING" at -258.26,-88.982 h2.29
  text "22)" at -257.117,-93.936 h1.91
  text "ALL BOARDS SHALL BE ELECTRICALLY TESTED TO THE SUPPLIED IPC-D-356A NET LIST" at -250.64,-93.936 h1.91
  text "FOR CONTINUITY, OPENS AND SHORTS." at -250.64,-97.745 h1.91
  text "Layer" at -255.338,-113.716 h1.52
  text "Name" at -244.926,-113.716 h1.52
  text "Material" at -210.392,-113.716 h1.52
  text "Thickness" at -188.554,-113.716 h1.52
  text "Constant" at -172.048,-113.716 h1.52
  text "Board Layer Stack" at -157.574,-113.716 h1.52
  text "1" at -255.338,-116.764 h1.52
  text "Top Paste" at -244.926,-116.764 h1.52
  text "2" at -255.338,-119.812 h1.52
  text "Top Overlay" at -244.926,-119.812 h1.52
  text "3" at -255.338,-122.86 h1.52
  text "Top Solder" at -244.926,-122.86 h1.52
  text "Solder Resist" at -210.392,-122.86 h1.52
  text "0.40mil" at -188.554,-122.86 h1.52
  text "3.5" at -172.048,-122.86 h1.52
  text "4" at -255.338,-125.908 h1.52
  text "Top Layer (*.GTL)" at -244.926,-125.908 h1.52
  text "Copper" at -210.392,-125.908 h1.52
  text "1.40mil" at -188.554,-125.908 h1.52
  text "5" at -255.338,-128.956 h1.52
  text "Dielectric1" at -244.926,-128.956 h1.52
  text "FR-4" at -210.392,-128.956 h1.52
  text "12.60mil" at -188.554,-128.956 h1.52
  text "4.8" at -172.048,-128.956 h1.52
  text "6" at -255.338,-132.004 h1.52
  text "MidLayer1 (*.G1)" at -244.926,-132.004 h1.52
  text "Copper" at -210.392,-132.004 h1.52
  text "1.40mil" at -188.554,-132.004 h1.52
  text "7" at -255.338,-135.052 h1.52
  text "Dielectric2" at -244.926,-135.052 h1.52
  text "FR-4" at -210.392,-135.052 h1.52
  text "10.00mil" at -188.554,-135.052 h1.52
  text "4.2" at -172.048,-135.052 h1.52
  text "8" at -255.338,-138.1 h1.52
  text "InternalPlane1 (*.GP1)" at -244.926,-138.1 h1.52
  text "Copper" at -210.392,-138.1 h1.52
  text "1.40mil" at -188.554,-138.1 h1.52
  text "9" at -255.338,-141.148 h1.52
  text "Dielectric3" at -244.926,-141.148 h1.52
  text "FR-4" at -210.392,-141.148 h1.52
  text "5.00mil" at -188.554,-141.148 h1.52
  text "4.2" at -172.048,-141.148 h1.52
  text "10" at -255.338,-144.196 h1.52
  text "InternalPlane2 (*.GP2)" at -244.926,-144.196 h1.52
  text "Copper" at -210.392,-144.196 h1.52
  text "1.40mil" at -188.554,-144.196 h1.52
  text "11" at -255.338,-147.244 h1.52
  text "Dielectric4" at -244.926,-147.244 h1.52
  text "FR-4" at -210.392,-147.244 h1.52
  text "10.00mil" at -188.554,-147.244 h1.52
  text "4.2" at -172.048,-147.244 h1.52
  text "12" at -255.338,-150.292 h1.52
  text "InternalPlane3 (*.GP3)" at -244.926,-150.292 h1.52
  text "Copper" at -210.392,-150.292 h1.52
  text "1.40mil" at -188.554,-150.292 h1.52
  text "13" at -255.338,-153.34 h1.52
  text "Dielectric5" at -244.926,-153.34 h1.52
  text "FR-4" at -210.392,-153.34 h1.52
  text "5.00mil" at -188.554,-153.34 h1.52
  text "4.2" at -172.048,-153.34 h1.52
  text "14" at -255.338,-156.388 h1.52
  text "InternalPlane4 (*.GP4)" at -244.926,-156.388 h1.52
  text "Copper" at -210.392,-156.388 h1.52
  text "1.40mil" at -188.554,-156.388 h1.52
  text "15" at -255.338,-159.436 h1.52
  text "Dielectric6" at -244.926,-159.436 h1.52
  text "FR-4" at -210.392,-159.436 h1.52
  text "10.00mil" at -188.554,-159.436 h1.52
  text "4.2" at -172.048,-159.436 h1.52
  text "16" at -255.338,-162.484 h1.52
  text "MidLayer2 (*.G2)" at -244.926,-162.484 h1.52
  text "Copper" at -210.392,-162.484 h1.52
  text "1.42mil" at -188.554,-162.484 h1.52
  text "17" at -255.338,-165.532 h1.52
  text "Dielectric 7" at -244.926,-165.532 h1.52
  text "5.00mil" at -188.554,-165.532 h1.52
  text "4.2" at -172.048,-165.532 h1.52
  text "18" at -255.338,-168.58 h1.52
  text "Bottom Layer (*.GBL)" at -244.926,-168.58 h1.52
  text "Copper" at -210.392,-168.58 h1.52
  text "1.40mil" at -188.554,-168.58 h1.52
  text "19" at -255.338,-171.628 h1.52
  text "Bottom Solder" at -244.926,-171.628 h1.52
  text "Solder Resist" at -210.392,-171.628 h1.52
  text "0.40mil" at -188.554,-171.628 h1.52
  text "3.5" at -172.048,-171.628 h1.52
  text "20" at -255.338,-174.676 h1.52
  text "Bottom Overlay" at -244.926,-174.676 h1.52
  text "21" at -255.338,-177.724 h1.52
  text "Bottom Paste" at -244.926,-177.724 h1.52
  text "Las Cumbres Observatory, Inc." at 209.912,-203.612 h2.29
  text "Las Cumbres Observatory" at 164.954,-206.66 h3.81
  text "PRIMARY PCB SPECIFICATIONS" at -67.786,-207.041 h5.08
  text "6740 Cortona Dr." at 221.088,-207.524 h2.29
  text "Global Telescope Network" at 169.018,-210.724 h3.17
  text "Goleta, CA 93117" at 219.818,-211.334 h2.29
  text "(REFER TO COMPLETE SPEC LISTING AT LEFT FOR FURTHER DETAILS)" at -76.6,-212.248 h2.54
  text "www.lcogt.net" at 223.374,-215.042 h2.29
  text "DATE" at 160.509,-217.856 h0.81
  text "DESIGNED" at 184.385,-217.856 h0.81
  text "DRAWN" at 211.817,-217.856 h0.81
  text "SCALE" at 239.249,-217.856 h0.81
  text "NUMBER OF LAYERS" at -74.06,-218.598 h3.81
  text "8" at 16.11,-218.598 h3.81
  text "Rich Lobdill" at 219.564,-220.376 h1.4
  text "Rich Lobdill" at 190.989,-220.503 h1.4
  text "1 : 1" at 246.488,-220.859 h2.29
  text "09/12/2014" at 161.271,-221.036 h2.29
  text "FINISHED THICKNESS" at -74.06,-224.948 h3.81
  text ".062\"" at 11.665,-224.948 h3.81
  text "CHECKED/DATE" at 160.509,-225.222 h0.81
  text "APPROVED/DATE" at 211.817,-225.222 h0.81
  text "BASE MATERIAL" at -74.06,-231.298 h3.81
  text "FR4" at 9.76,-231.298 h3.81
  text "TITLE" at 160.509,-232.588 h0.81
  text "175-00060, NRES, RTD/TEC BOARD" at 166.097,-236.251 h2.54
  text "GOLD IMMERSION" at -2.787,-236.81 h3.81
  text "PLATING TYPE" at -74.06,-237.648 h3.81
  text "THIS DRAWING EMBODIES A PROPRIETARY DESIGN OWNED BY LAS CUMBRES" at -267.608,-238.258 h1.52
  text "OBSERVATORY.  IT IS SUBMITTED FOR A SPECIFIC PURPOSE UNDER A CON-" at -267.608,-240.798 h1.52
  text "SIZE" at 160.509,-240.97 h0.81
  text "DOC NO." at 172.193,-240.97 h0.81
  text "REV" at 225.025,-240.97 h0.81
  text "SHEET" at 236.709,-240.97 h0.81
  text "FIDENTIAL RELATIONSHIP, AND EXCEPT FOR PURPOSES EXPRESSLY GRANTED" at -267.608,-243.211 h1.52
  text "OF" at 247.631,-243.592 h1.52
  text "SOLDER MASK COLOR" at -74.06,-243.998 h3.81
  text "BLACK" at 12.935,-243.998 h3.81
  text "1" at 243.313,-244.1 h2.54
  text "X" at 253.473,-244.1 h2.54
  text "2" at 228.708,-244.43 h3.3
  text "-" at 186.29,-244.481 h3.3
  text "GPT" at 204.571,-244.856 h3.3
  text "C" at 163.938,-244.887 h2.54
  text "IN WRITING, ALL RIGHTS ARE RESERVED BY LAS CUMBRES OBSERVATORY." at -267.608,-245.497 h1.52
Mechanical 5:
  text "175-00060, rev 2" at 61.239,-23.317 h2.03
  text "PCB, NRES, RTD/TEC BOARD" at 61.493,-27.94 h2.03
  text "LAS CUMBRES OBSERVATORY     09/12/2014" at 61.399,-32.452 h2.03
Drill Drawing:
  lines w0.254: -270.402,-247.427 -270.402,158.973 262.998,158.973 262.998,-247.427 -270.402,-247.427 ; 160.001,-244.735 ccw(c161.271,-244.735) 161.271,-246.005 169.653,-246.005 ccw(c169.653,-244.989) 170.669,-244.989 170.669,-240.671 ccw(c169.653,-240.671) 169.653,-239.655 160.001,-239.655 160.001,-244.735 ; 160.001,-237.369 ccw(c161.271,-237.369) 161.271,-238.639 260.331,-238.639 ccw(c260.331,-237.369) 261.601,-237.369 261.601,-232.543 ccw(c260.331,-232.543) 260.331,-231.273 160.001,-231.273 160.001,-237.369 ; 160.001,-229.241 ccw(c161.017,-229.241) 161.017,-230.257 197.085,-230.257 ccw(c197.085,-228.987) 198.355,-228.987 198.355,-225.177 ccw(c197.085,-225.177) 197.085,-223.907 160.001,-223.907 160.001,-229.241 ; 171.685,-244.989 ccw(c172.701,-244.989) 172.701,-246.005 222.485,-246.005 ccw(c222.485,-244.989) 223.501,-244.989 223.501,-240.671 ccw(c222.485,-240.671) 222.485,-239.655 171.685,-239.655 171.685,-244.989 ; 199.371,-228.987 ccw(c200.641,-228.987) 200.641,-230.257 236.455,-230.257 ccw(c236.455,-228.987) 237.725,-228.987 237.725,-225.177 ccw(c236.455,-225.177) 236.455,-223.907 199.371,-223.907 199.371,-228.987 ; 224.517,-244.735 ccw(c225.787,-244.735) 225.787,-246.005 234.169,-246.005 ccw(c234.169,-244.989) 235.185,-244.989 235.185,-240.671 ccw(c234.169,-240.671) 234.169,-239.655 224.517,-239.655 224.517,-244.735 ; 236.201,-244.989 ccw(c237.217,-244.989) 237.217,-246.005 260.331,-246.005 ccw(c260.331,-244.735) 261.601,-244.735 261.601,-240.925 ccw(c260.331,-240.925) 260.331,-239.655 236.201,-239.655 236.201,-244.989 ; 238.741,-228.987 ccw(c240.011,-228.987) 240.011,-230.257 260.331,-230.257 ccw(c260.331,-228.987) 261.601,-228.987 261.601,-225.177 ccw(c260.331,-225.177) 260.331,-223.907 238.741,-223.907 238.741,-228.987
  lines w0.508: -269.765,-231.403 cw(c-268.497,-233.305) -268.497,-231.019 ; -268.497,-232.035 ccw(c-268.497,-233.305) -269.767,-233.305 -269.767,-245.751 ccw(c-268.497,-245.751) -268.497,-247.021 -187.217,-247.021 ccw(c-187.217,-245.751) -185.947,-245.751 -185.947,-237.115 ccw(c-187.217,-237.115) -187.217,-235.845 -254.273,-235.845 ; -185.315,-247.019 ccw(c-187.217,-245.751) -184.931,-245.751 -184.931,-237.115 ; 158.856,-246.987 cw(c161.271,-244.735) 157.969,-244.735 157.969,-223.907 cw(c160.001,-223.907) 160.001,-221.875 260.331,-221.875 cw(c260.331,-225.177) 262.583,-222.762 ; 158.985,-244.735 ccw(c161.271,-244.735) 161.271,-247.021 260.331,-247.021 ccw(c260.331,-244.735) 262.617,-244.735 262.617,-225.177 ccw(c260.331,-225.177) 260.331,-222.891 160.001,-222.891 ccw(c160.001,-223.907) 158.985,-223.907 158.985,-244.735
  lines w0.762: -283.102,-260.127 -283.102,171.673 275.698,171.673 275.698,-260.127 -283.102,-260.127
  text ".Legend" at -4.362,-142.855 h2.54
  text "DESIGNED" at 160.509,-225.222 h0.81
  text "DRAWN" at 199.879,-225.222 h0.81
  text "SCALE" at 239.249,-225.222 h0.81
  text "Rich Lobdill" at 172.854,-227.666 h1.4
  text "Rich Lobdill" at 212.503,-227.717 h1.4
  text "1 : 1" at 246.488,-228.225 h2.29
  text "TITLE" at 160.509,-232.588 h0.81
  text "175-00060, NRES, RTD/TEC BOARD" at 166.021,-236.251 h2.54
  text "THIS DRAWING EMBODIES A PROPRIETARY DESIGN OWNED BY LAS CUMBRES" at -267.481,-238.639 h1.52
  text "SIZE" at 160.509,-240.97 h0.81
  text "DOC NO." at 172.193,-240.97 h0.81
  text "REV" at 225.025,-240.97 h0.81
  text "SHEET" at 236.709,-240.97 h0.81
  text "OBSERVATORY.  IT IS SUBMITTED FOR A SPECIFIC PURPOSE UNDER A CON-" at -267.481,-241.179 h1.52
  text "FIDENTIAL RELATIONSHIP, AND EXCEPT FOR PURPOSES EXPRESSLY GRANTED" at -267.481,-243.592 h1.52
  text "OF" at 247.631,-243.592 h1.52
  text "2" at 242.932,-244.1 h2.54
  text "X" at 253.473,-244.1 h2.54
  text "-" at 186.29,-244.481 h3.3
  text "2" at 228.581,-244.481 h3.3
  text "C" at 163.938,-244.887 h3.05
  text "GD1" at 207.118,-244.887 h3.05
  text "IN WRITING, ALL RIGHTS ARE RESERVED BY LAS CUMBRES OBSERVATORY." at -267.481,-245.878 h1.52

## Dimensions
-9.303,69.929 to -0.54,84.929 on Mechanical 2
-9.303,69.929 to 179,85 on Mechanical 2
179,0 to 179,85 on Mechanical 2
-11,54 to -29,76 on Mechanical 2

## Text inside footprints (layer, text, board x,y; h text height)
P1: Top Overlay "1" at 78.359,74.422 h0.76